# EAGLE board oa_sevenfortyfun_panel (EAGLE 6.5.0)
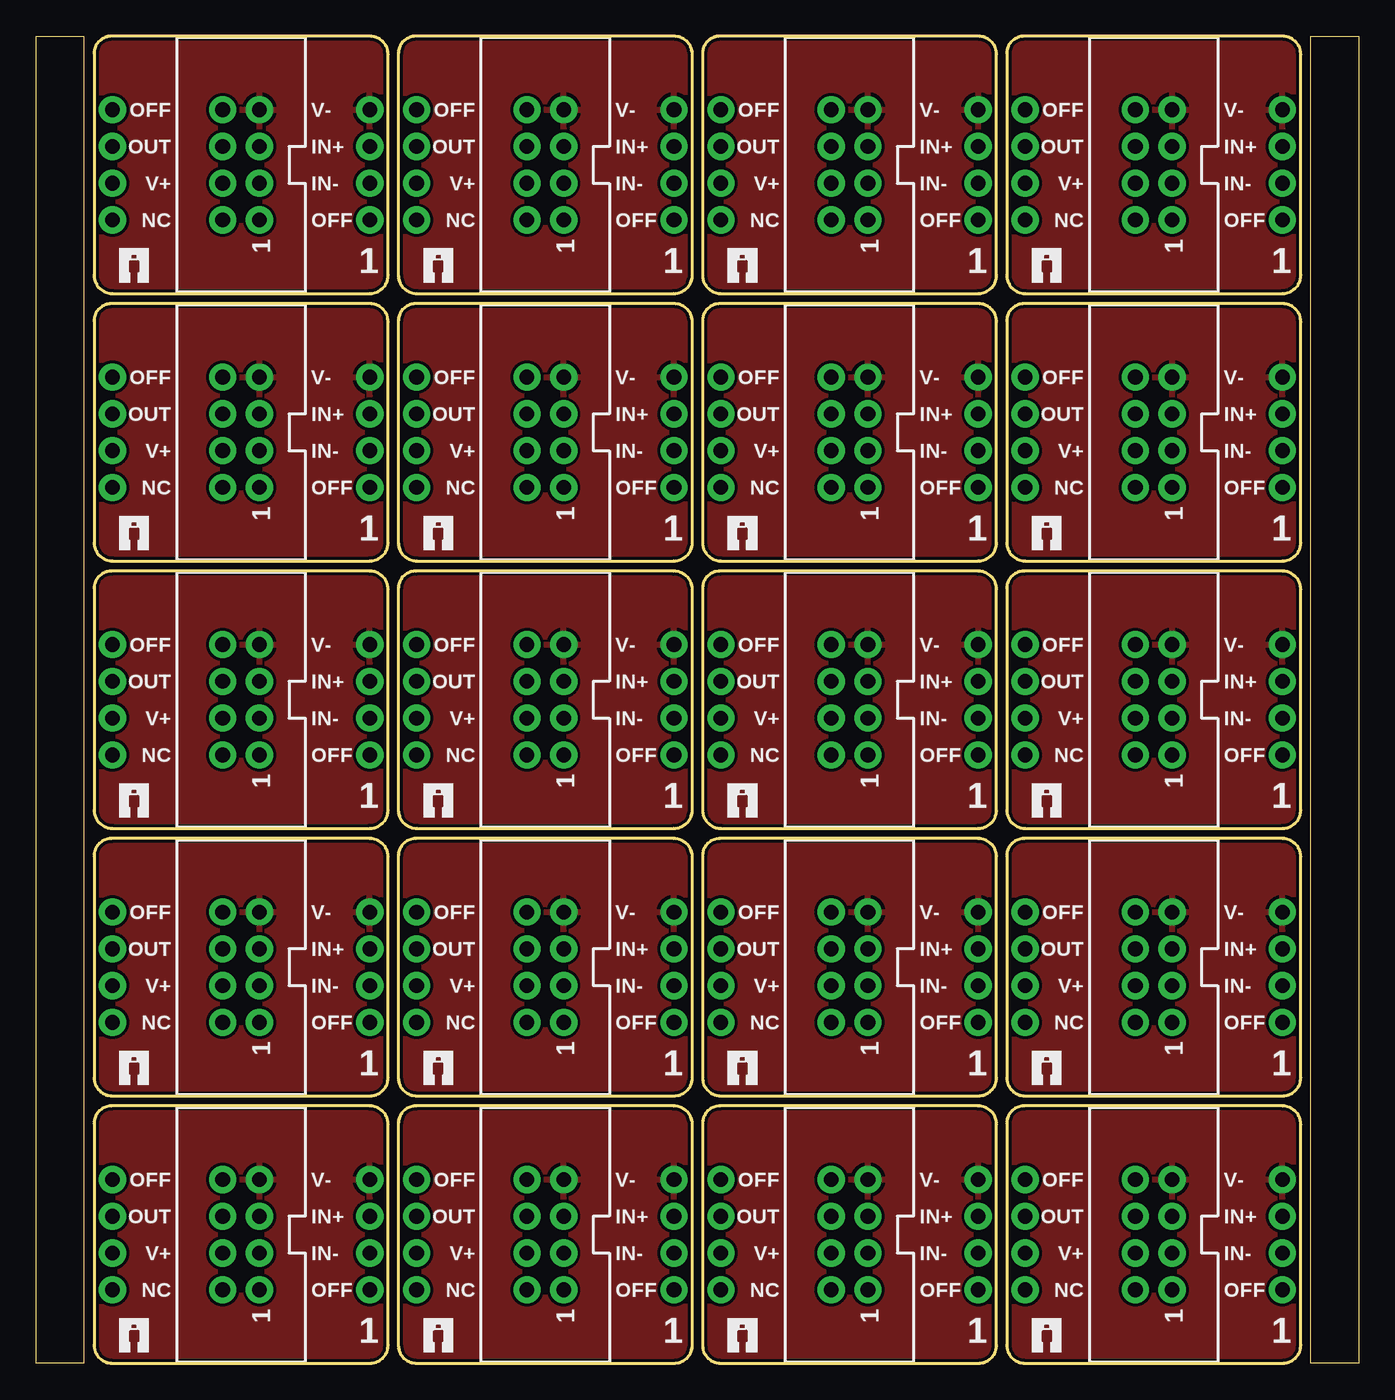
[diagram p0: board, top side]
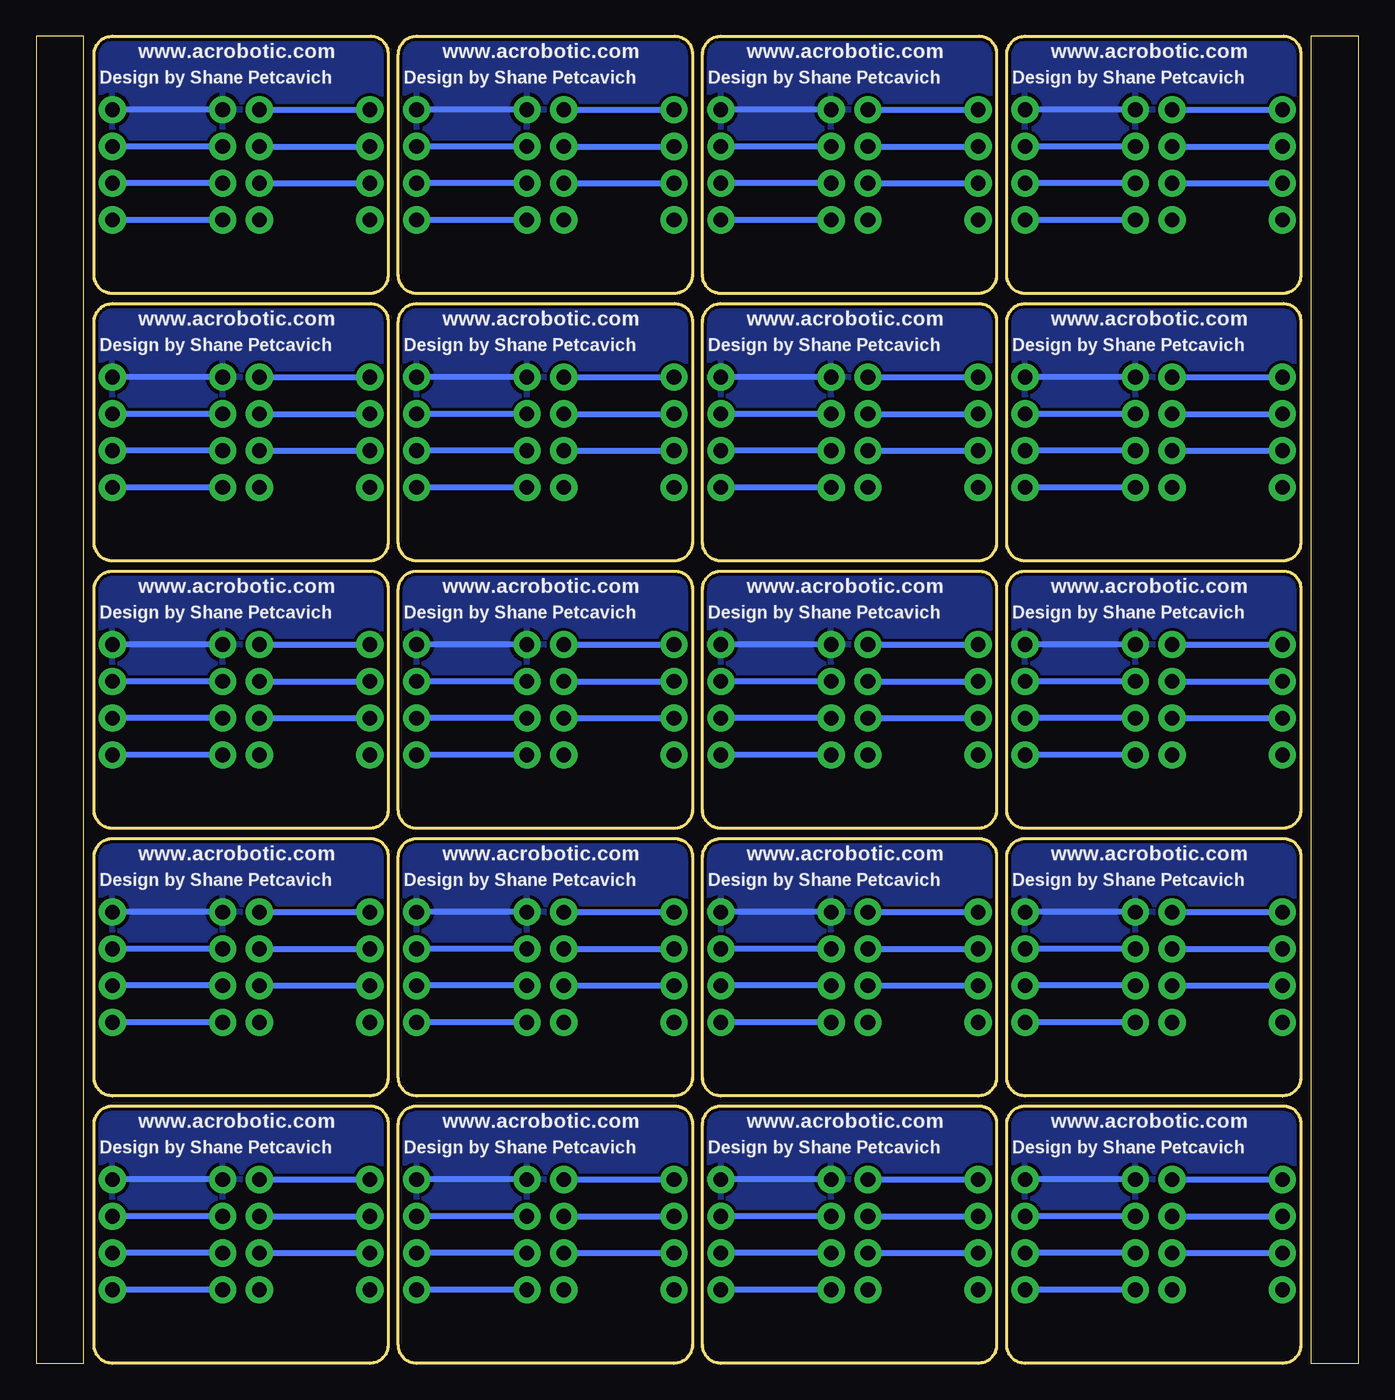
[diagram p1: board, bottom side, seen from below]

Size 91.38 x 91.7 mm. Coordinates in mm from the lower left corner, seen from the top.
Outline: 23.05,17.78 5.2,17.78 arc90 4,16.58 4,1.27 arc90 5.27,0 23.05,0 arc90 24.32,1.27 24.32,16.51 arc90 23.05,17.78
Outline: 0,0 0,91.7 3.3,91.7 3.3,0 0,0
Outline: 23.05,36.26 5.2,36.26 arc90 4,35.06 4,19.75 arc90 5.27,18.48 23.05,18.48 arc90 24.32,19.75 24.32,34.99 arc90 23.05,36.26
Outline: 23.05,54.74 5.2,54.74 arc90 4,53.54 4,38.23 arc90 5.27,36.96 23.05,36.96 arc90 24.32,38.23 24.32,53.47 arc90 23.05,54.74
Outline: 23.05,73.22 5.2,73.22 arc90 4,72.02 4,56.71 arc90 5.27,55.44 23.05,55.44 arc90 24.32,56.71 24.32,71.95 arc90 23.05,73.22
Outline: 23.05,91.7 5.2,91.7 arc90 4,90.5 4,75.19 arc90 5.27,73.92 23.05,73.92 arc90 24.32,75.19 24.32,90.43 arc90 23.05,91.7
Outline: 44.07,17.78 26.22,17.78 arc90 25.02,16.58 25.02,1.27 arc90 26.29,0 44.07,0 arc90 45.34,1.27 45.34,16.51 arc90 44.07,17.78
Outline: 44.07,36.26 26.22,36.26 arc90 25.02,35.06 25.02,19.75 arc90 26.29,18.48 44.07,18.48 arc90 45.34,19.75 45.34,34.99 arc90 44.07,36.26
Outline: 44.07,54.74 26.22,54.74 arc90 25.02,53.54 25.02,38.23 arc90 26.29,36.96 44.07,36.96 arc90 45.34,38.23 45.34,53.47 arc90 44.07,54.74
Outline: 44.07,73.22 26.22,73.22 arc90 25.02,72.02 25.02,56.71 arc90 26.29,55.44 44.07,55.44 arc90 45.34,56.71 45.34,71.95 arc90 44.07,73.22
Outline: 44.07,91.7 26.22,91.7 arc90 25.02,90.5 25.02,75.19 arc90 26.29,73.92 44.07,73.92 arc90 45.34,75.19 45.34,90.43 arc90 44.07,91.7
Outline: 65.09,17.78 47.24,17.78 arc90 46.04,16.58 46.04,1.27 arc90 47.31,0 65.09,0 arc90 66.36,1.27 66.36,16.51 arc90 65.09,17.78
Outline: 65.09,36.26 47.24,36.26 arc90 46.04,35.06 46.04,19.75 arc90 47.31,18.48 65.09,18.48 arc90 66.36,19.75 66.36,34.99 arc90 65.09,36.26
Outline: 65.09,54.74 47.24,54.74 arc90 46.04,53.54 46.04,38.23 arc90 47.31,36.96 65.09,36.96 arc90 66.36,38.23 66.36,53.47 arc90 65.09,54.74
Outline: 65.09,73.22 47.24,73.22 arc90 46.04,72.02 46.04,56.71 arc90 47.31,55.44 65.09,55.44 arc90 66.36,56.71 66.36,71.95 arc90 65.09,73.22
Outline: 65.09,91.7 47.24,91.7 arc90 46.04,90.5 46.04,75.19 arc90 47.31,73.92 65.09,73.92 arc90 66.36,75.19 66.36,90.43 arc90 65.09,91.7
Outline: 86.11,17.78 68.26,17.78 arc90 67.06,16.58 67.06,1.27 arc90 68.33,0 86.11,0 arc90 87.38,1.27 87.38,16.51 arc90 86.11,17.78
Outline: 86.11,36.26 68.26,36.26 arc90 67.06,35.06 67.06,19.75 arc90 68.33,18.48 86.11,18.48 arc90 87.38,19.75 87.38,34.99 arc90 86.11,36.26
Outline: 86.11,54.74 68.26,54.74 arc90 67.06,53.54 67.06,38.23 arc90 68.33,36.96 86.11,36.96 arc90 87.38,38.23 87.38,53.47 arc90 86.11,54.74
Outline: 86.11,73.22 68.26,73.22 arc90 67.06,72.02 67.06,56.71 arc90 68.33,55.44 86.11,55.44 arc90 87.38,56.71 87.38,71.95 arc90 86.11,73.22
Outline: 86.11,91.7 68.26,91.7 arc90 67.06,90.5 67.06,75.19 arc90 68.33,73.92 86.11,73.92 arc90 87.38,75.19 87.38,90.43 arc90 86.11,91.7
Outline: 88.08,0 88.08,91.7 91.38,91.7 91.38,0 88.08,0
Copper layers (1*16): Top 0.035mm / dielectric 1.5mm / Bottom 0.035mm
Design rules "ai_2layer": minimum track width 7mil, minimum drill 15mil, track to track 8mil, track to pad 8mil, pad to pad 8mil, via to via 8mil, smd to smd 8mil, copper to edge 8mil, drill to drill 8mil, minimum pad ring 12mil, minimum via ring 10mil, stop-mask expansion 4mil, vias tented up to drill 20mil, thermal gap 10mil
Net classes: 0 signal: width 0.254 mm; 1 power: width 0.305 mm

## Footprints (pad centres in the part's own frame; a part is rotated, then mirrored left to right if it is on the bottom)
1X04-NOSILK = drill 1.016 pad 1.88: 1 -3.81,0; 2 -1.27,0; 3 1.27,0; 4 3.81,0
1X04-NOFIRST = drill 1.016 pad 1.88: 1 -3.81,0; 2 -1.27,0; 3 1.27,0; 4 3.81,0
2X04-SHR = drill 1.016 pad 1.88: 1 -3.81,-1.27; 2 -3.81,1.27; 3 -1.27,-1.27; 4 -1.27,1.27; 5 1.27,-1.27; 6 1.27,1.27; 7 3.81,-1.27; 8 3.81,1.27

## Placement (x,y rotation side)
J1  1X04NOSILK  [1X04-NOSILK]  23.05,8.89 90 top
J2  1X04NOFIRST  [1X04-NOFIRST]  5.27,8.89 90 top
J3  2X04SHR  [2X04-SHR]  14.16,27.37 90 top
J4  1X04NOSILK  [1X04-NOSILK]  23.05,27.37 90 top
J5  1X04NOFIRST  [1X04-NOFIRST]  5.27,27.37 90 top
J6  2X04SHR  [2X04-SHR]  14.16,45.85 90 top
J7  1X04NOSILK  [1X04-NOSILK]  23.05,45.85 90 top
J8  1X04NOFIRST  [1X04-NOFIRST]  5.27,45.85 90 top
J9  2X04SHR  [2X04-SHR]  14.16,8.89 90 top
J10  2X04SHR  [2X04-SHR]  14.16,64.33 90 top
J11  1X04NOSILK  [1X04-NOSILK]  23.05,64.33 90 top
J12  1X04NOFIRST  [1X04-NOFIRST]  5.27,64.33 90 top
J13  2X04SHR  [2X04-SHR]  14.16,82.81 90 top
J14  1X04NOSILK  [1X04-NOSILK]  23.05,82.81 90 top
J15  1X04NOFIRST  [1X04-NOFIRST]  5.27,82.81 90 top
J16  2X04SHR  [2X04-SHR]  35.18,8.89 90 top
J17  1X04NOSILK  [1X04-NOSILK]  44.07,8.89 90 top
J18  1X04NOFIRST  [1X04-NOFIRST]  26.29,8.89 90 top
J19  2X04SHR  [2X04-SHR]  35.18,27.37 90 top
J20  1X04NOSILK  [1X04-NOSILK]  44.07,27.37 90 top
J21  1X04NOFIRST  [1X04-NOFIRST]  26.29,27.37 90 top
J22  2X04SHR  [2X04-SHR]  35.18,45.85 90 top
J23  1X04NOSILK  [1X04-NOSILK]  44.07,45.85 90 top
J24  1X04NOFIRST  [1X04-NOFIRST]  26.29,45.85 90 top
J25  2X04SHR  [2X04-SHR]  35.18,64.33 90 top
J26  1X04NOSILK  [1X04-NOSILK]  44.07,64.33 90 top
J27  1X04NOFIRST  [1X04-NOFIRST]  26.29,64.33 90 top
J28  2X04SHR  [2X04-SHR]  35.18,82.81 90 top
J29  1X04NOSILK  [1X04-NOSILK]  44.07,82.81 90 top
J30  1X04NOFIRST  [1X04-NOFIRST]  26.29,82.81 90 top
J31  2X04SHR  [2X04-SHR]  56.2,8.89 90 top
J32  1X04NOSILK  [1X04-NOSILK]  65.09,8.89 90 top
J33  1X04NOFIRST  [1X04-NOFIRST]  47.31,8.89 90 top
J34  2X04SHR  [2X04-SHR]  56.2,27.37 90 top
J35  1X04NOSILK  [1X04-NOSILK]  65.09,27.37 90 top
J36  1X04NOFIRST  [1X04-NOFIRST]  47.31,27.37 90 top
J37  2X04SHR  [2X04-SHR]  56.2,45.85 90 top
J38  1X04NOSILK  [1X04-NOSILK]  65.09,45.85 90 top
J39  1X04NOFIRST  [1X04-NOFIRST]  47.31,45.85 90 top
J40  2X04SHR  [2X04-SHR]  56.2,64.33 90 top
J41  1X04NOSILK  [1X04-NOSILK]  65.09,64.33 90 top
J42  1X04NOFIRST  [1X04-NOFIRST]  47.31,64.33 90 top
J43  2X04SHR  [2X04-SHR]  56.2,82.81 90 top
J44  1X04NOSILK  [1X04-NOSILK]  65.09,82.81 90 top
J45  1X04NOFIRST  [1X04-NOFIRST]  47.31,82.81 90 top
J46  2X04SHR  [2X04-SHR]  77.22,8.89 90 top
J47  1X04NOSILK  [1X04-NOSILK]  86.11,8.89 90 top
J48  1X04NOFIRST  [1X04-NOFIRST]  68.33,8.89 90 top
J49  2X04SHR  [2X04-SHR]  77.22,27.37 90 top
J50  1X04NOSILK  [1X04-NOSILK]  86.11,27.37 90 top
J51  1X04NOFIRST  [1X04-NOFIRST]  68.33,27.37 90 top
J52  2X04SHR  [2X04-SHR]  77.22,45.85 90 top
J53  1X04NOSILK  [1X04-NOSILK]  86.11,45.85 90 top
J54  1X04NOFIRST  [1X04-NOFIRST]  68.33,45.85 90 top
J55  2X04SHR  [2X04-SHR]  77.22,64.33 90 top
J56  1X04NOSILK  [1X04-NOSILK]  86.11,64.33 90 top
J57  1X04NOFIRST  [1X04-NOFIRST]  68.33,64.33 90 top
J58  2X04SHR  [2X04-SHR]  77.22,82.81 90 top
J59  1X04NOSILK  [1X04-NOSILK]  86.11,82.81 90 top
J60  1X04NOFIRST  [1X04-NOFIRST]  68.33,82.81 90 top
U$1  AI-LOGOXS  [AI-LOGO-XS]  5.78,19.24 0 top
U$2  AI-LOGOXS  [AI-LOGO-XS]  5.78,37.72 0 top
U$3  AI-LOGOXS  [AI-LOGO-XS]  5.78,0.76 0 top
U$4  AI-LOGOXS  [AI-LOGO-XS]  5.78,56.2 0 top
U$5  AI-LOGOXS  [AI-LOGO-XS]  5.78,74.68 0 top
U$6  AI-LOGOXS  [AI-LOGO-XS]  26.8,0.76 0 top
U$7  AI-LOGOXS  [AI-LOGO-XS]  26.8,19.24 0 top
U$8  AI-LOGOXS  [AI-LOGO-XS]  26.8,37.72 0 top
U$9  AI-LOGOXS  [AI-LOGO-XS]  26.8,56.2 0 top
U$10  AI-LOGOXS  [AI-LOGO-XS]  26.8,74.68 0 top
U$11  AI-LOGOXS  [AI-LOGO-XS]  47.82,0.76 0 top
U$12  AI-LOGOXS  [AI-LOGO-XS]  47.82,19.24 0 top
U$13  AI-LOGOXS  [AI-LOGO-XS]  47.82,37.72 0 top
U$14  AI-LOGOXS  [AI-LOGO-XS]  47.82,56.2 0 top
U$15  AI-LOGOXS  [AI-LOGO-XS]  47.82,74.68 0 top
U$16  AI-LOGOXS  [AI-LOGO-XS]  68.84,0.76 0 top
U$17  AI-LOGOXS  [AI-LOGO-XS]  68.84,19.24 0 top
U$18  AI-LOGOXS  [AI-LOGO-XS]  68.84,37.72 0 top
U$19  AI-LOGOXS  [AI-LOGO-XS]  68.84,56.2 0 top
U$20  AI-LOGOXS  [AI-LOGO-XS]  68.84,74.68 0 top

## Library data of the parts
J1-J60 = Ai_Connectors
U$1-U$20 = Ai_Miscellany

## Nets
INVERTING(-): J1.2 J9.3
INVERTING(-)1: J3.3 J4.2
INVERTING(-)2: J6.3 J7.2
INVERTING(-)3: J10.3 J11.2
INVERTING(-)4: J13.3 J14.2
INVERTING(-)5: J16.3 J17.2
INVERTING(-)6: J19.3 J20.2
INVERTING(-)7: J22.3 J23.2
INVERTING(-)8: J25.3 J26.2
INVERTING(-)9: J28.3 J29.2
INVERTING(-)10: J31.3 J32.2
INVERTING(-)11: J34.3 J35.2
INVERTING(-)12: J37.3 J38.2
INVERTING(-)13: J40.3 J41.2
INVERTING(-)14: J43.3 J44.2
INVERTING(-)15: J46.3 J47.2
INVERTING(-)16: J49.3 J50.2
INVERTING(-)17: J52.3 J53.2
INVERTING(-)18: J55.3 J56.2
INVERTING(-)19: J58.3 J59.2
NON-INVERTING(+): J1.3 J9.5
NON-INVERTING(+)1: J3.5 J4.3
NON-INVERTING(+)2: J6.5 J7.3
NON-INVERTING(+)3: J10.5 J11.3
NON-INVERTING(+)4: J13.5 J14.3
NON-INVERTING(+)5: J16.5 J17.3
NON-INVERTING(+)6: J19.5 J20.3
NON-INVERTING(+)7: J22.5 J23.3
NON-INVERTING(+)8: J25.5 J26.3
NON-INVERTING(+)9: J28.5 J29.3
NON-INVERTING(+)10: J31.5 J32.3
NON-INVERTING(+)11: J34.5 J35.3
NON-INVERTING(+)12: J37.5 J38.3
NON-INVERTING(+)13: J40.5 J41.3
NON-INVERTING(+)14: J43.5 J44.3
NON-INVERTING(+)15: J46.5 J47.3
NON-INVERTING(+)16: J49.5 J50.3
NON-INVERTING(+)17: J52.5 J53.3
NON-INVERTING(+)18: J55.5 J56.3
NON-INVERTING(+)19: J58.5 J59.3
OFFSET_NULL1: J1.1 J9.1
OFFSET_NULL2: J2.4 J9.8
OFFSET_NULL3: J3.8 J5.4
OFFSET_NULL4: J3.1 J4.1
OFFSET_NULL5: J6.8 J8.4
OFFSET_NULL6: J6.1 J7.1
OFFSET_NULL7: J10.8 J12.4
OFFSET_NULL8: J10.1 J11.1
OFFSET_NULL9: J13.8 J15.4
OFFSET_NULL10: J13.1 J14.1
OFFSET_NULL11: J16.8 J18.4
OFFSET_NULL12: J16.1 J17.1
OFFSET_NULL13: J19.8 J21.4
OFFSET_NULL14: J19.1 J20.1
OFFSET_NULL15: J22.8 J24.4
OFFSET_NULL16: J22.1 J23.1
OFFSET_NULL17: J25.8 J27.4
OFFSET_NULL18: J25.1 J26.1
OFFSET_NULL19: J28.8 J30.4
OFFSET_NULL20: J28.1 J29.1
OFFSET_NULL21: J31.8 J33.4
OFFSET_NULL22: J31.1 J32.1
OFFSET_NULL23: J34.8 J36.4
OFFSET_NULL24: J34.1 J35.1
OFFSET_NULL25: J37.8 J39.4
OFFSET_NULL26: J37.1 J38.1
OFFSET_NULL27: J40.8 J42.4
OFFSET_NULL28: J40.1 J41.1
OFFSET_NULL29: J43.8 J45.4
OFFSET_NULL30: J43.1 J44.1
OFFSET_NULL31: J46.8 J48.4
OFFSET_NULL32: J46.1 J47.1
OFFSET_NULL33: J49.8 J51.4
OFFSET_NULL34: J49.1 J50.1
OFFSET_NULL35: J52.8 J54.4
OFFSET_NULL36: J52.1 J53.1
OFFSET_NULL37: J55.8 J57.4
OFFSET_NULL38: J55.1 J56.1
OFFSET_NULL39: J58.8 J60.4
OFFSET_NULL40: J58.1 J59.1
OUTPUT: J2.3 J9.6
OUTPUT1: J3.6 J5.3
OUTPUT2: J6.6 J8.3
OUTPUT3: J10.6 J12.3
OUTPUT4: J13.6 J15.3
OUTPUT5: J16.6 J18.3
OUTPUT6: J19.6 J21.3
OUTPUT7: J22.6 J24.3
OUTPUT8: J25.6 J27.3
OUTPUT9: J28.6 J30.3
OUTPUT10: J31.6 J33.3
OUTPUT11: J34.6 J36.3
OUTPUT12: J37.6 J39.3
OUTPUT13: J40.6 J42.3
OUTPUT14: J43.6 J45.3
OUTPUT15: J46.6 J48.3
OUTPUT16: J49.6 J51.3
OUTPUT17: J52.6 J54.3
OUTPUT18: J55.6 J57.3
OUTPUT19: J58.6 J60.3
VCC+: J2.2 J9.4
VCC+1: J3.4 J5.2
VCC+2: J6.4 J8.2
VCC+3: J10.4 J12.2
VCC+4: J13.4 J15.2
VCC+5: J16.4 J18.2
VCC+6: J19.4 J21.2
VCC+7: J22.4 J24.2
VCC+8: J25.4 J27.2
VCC+9: J28.4 J30.2
VCC+10: J31.4 J33.2
VCC+11: J34.4 J36.2
VCC+12: J37.4 J39.2
VCC+13: J40.4 J42.2
VCC+14: J43.4 J45.2
VCC+15: J46.4 J48.2
VCC+16: J49.4 J51.2
VCC+17: J52.4 J54.2
VCC+18: J55.4 J57.2
VCC+19: J58.4 J60.2
VCC-: J1.4 J9.7
VCC-1: J3.7 J4.4
VCC-2: J6.7 J7.4
VCC-3: J10.7 J11.4
VCC-4: J13.7 J14.4
VCC-5: J16.7 J17.4
VCC-6: J19.7 J20.4
VCC-7: J22.7 J23.4
VCC-8: J25.7 J26.4
VCC-9: J28.7 J29.4
VCC-10: J31.7 J32.4
VCC-11: J34.7 J35.4
VCC-12: J37.7 J38.4
VCC-13: J40.7 J41.4
VCC-14: J43.7 J44.4
VCC-15: J46.7 J47.4
VCC-16: J49.7 J50.4
VCC-17: J52.7 J53.4
VCC-18: J55.7 J56.4
VCC-19: J58.7 J59.4

## Tracks (layer width: path | path; a pad name or v marks a point on that pad's centre or on a via)
INVERTING(-)
  Bottom 0.406: J9.3 J1.2
INVERTING(-)1
  Bottom 0.406: J3.3 J4.2
INVERTING(-)2
  Bottom 0.406: J6.3 J7.2
INVERTING(-)3
  Bottom 0.406: J10.3 J11.2
INVERTING(-)4
  Bottom 0.406: J13.3 J14.2
INVERTING(-)5
  Bottom 0.406: J16.3 J17.2
INVERTING(-)6
  Bottom 0.406: J19.3 J20.2
INVERTING(-)7
  Bottom 0.406: J22.3 J23.2
INVERTING(-)8
  Bottom 0.406: J25.3 J26.2
INVERTING(-)9
  Bottom 0.406: J28.3 J29.2
INVERTING(-)10
  Bottom 0.406: J31.3 J32.2
INVERTING(-)11
  Bottom 0.406: J34.3 J35.2
INVERTING(-)12
  Bottom 0.406: J37.3 J38.2
INVERTING(-)13
  Bottom 0.406: J40.3 J41.2
INVERTING(-)14
  Bottom 0.406: J43.3 J44.2
INVERTING(-)15
  Bottom 0.406: J46.3 J47.2
INVERTING(-)16
  Bottom 0.406: J49.3 J50.2
INVERTING(-)17
  Bottom 0.406: J52.3 J53.2
INVERTING(-)18
  Bottom 0.406: J55.3 J56.2
INVERTING(-)19
  Bottom 0.406: J58.3 J59.2
NON-INVERTING(+)
  Bottom 0.406: J9.5 J1.3
NON-INVERTING(+)1
  Bottom 0.406: J3.5 J4.3
NON-INVERTING(+)2
  Bottom 0.406: J6.5 J7.3
NON-INVERTING(+)3
  Bottom 0.406: J10.5 J11.3
NON-INVERTING(+)4
  Bottom 0.406: J13.5 J14.3
NON-INVERTING(+)5
  Bottom 0.406: J16.5 J17.3
NON-INVERTING(+)6
  Bottom 0.406: J19.5 J20.3
NON-INVERTING(+)7
  Bottom 0.406: J22.5 J23.3
NON-INVERTING(+)8
  Bottom 0.406: J25.5 J26.3
NON-INVERTING(+)9
  Bottom 0.406: J28.5 J29.3
NON-INVERTING(+)10
  Bottom 0.406: J31.5 J32.3
NON-INVERTING(+)11
  Bottom 0.406: J34.5 J35.3
NON-INVERTING(+)12
  Bottom 0.406: J37.5 J38.3
NON-INVERTING(+)13
  Bottom 0.406: J40.5 J41.3
NON-INVERTING(+)14
  Bottom 0.406: J43.5 J44.3
NON-INVERTING(+)15
  Bottom 0.406: J46.5 J47.3
NON-INVERTING(+)16
  Bottom 0.406: J49.5 J50.3
NON-INVERTING(+)17
  Bottom 0.406: J52.5 J53.3
NON-INVERTING(+)18
  Bottom 0.406: J55.5 J56.3
NON-INVERTING(+)19
  Bottom 0.406: J58.5 J59.3
OFFSET_NULL1
  Bottom 0.406: J9.1 J1.1
OFFSET_NULL2
  Bottom 0.406: J9.8 J2.4
OFFSET_NULL3
  Bottom 0.406: J3.8 J5.4
OFFSET_NULL4
  Bottom 0.406: J3.1 J4.1
OFFSET_NULL5
  Bottom 0.406: J6.8 J8.4
OFFSET_NULL6
  Bottom 0.406: J6.1 J7.1
OFFSET_NULL7
  Bottom 0.406: J10.8 J12.4
OFFSET_NULL8
  Bottom 0.406: J10.1 J11.1
OFFSET_NULL9
  Bottom 0.406: J13.8 J15.4
OFFSET_NULL10
  Bottom 0.406: J13.1 J14.1
OFFSET_NULL11
  Bottom 0.406: J16.8 J18.4
OFFSET_NULL12
  Bottom 0.406: J16.1 J17.1
OFFSET_NULL13
  Bottom 0.406: J19.8 J21.4
OFFSET_NULL14
  Bottom 0.406: J19.1 J20.1
OFFSET_NULL15
  Bottom 0.406: J22.8 J24.4
OFFSET_NULL16
  Bottom 0.406: J22.1 J23.1
OFFSET_NULL17
  Bottom 0.406: J25.8 J27.4
OFFSET_NULL18
  Bottom 0.406: J25.1 J26.1
OFFSET_NULL19
  Bottom 0.406: J28.8 J30.4
OFFSET_NULL20
  Bottom 0.406: J28.1 J29.1
OFFSET_NULL21
  Bottom 0.406: J31.8 J33.4
OFFSET_NULL22
  Bottom 0.406: J31.1 J32.1
OFFSET_NULL23
  Bottom 0.406: J34.8 J36.4
OFFSET_NULL24
  Bottom 0.406: J34.1 J35.1
OFFSET_NULL25
  Bottom 0.406: J37.8 J39.4
OFFSET_NULL26
  Bottom 0.406: J37.1 J38.1
OFFSET_NULL27
  Bottom 0.406: J40.8 J42.4
OFFSET_NULL28
  Bottom 0.406: J40.1 J41.1
OFFSET_NULL29
  Bottom 0.406: J43.8 J45.4
OFFSET_NULL30
  Bottom 0.406: J43.1 J44.1
OFFSET_NULL31
  Bottom 0.406: J46.8 J48.4
OFFSET_NULL32
  Bottom 0.406: J46.1 J47.1
OFFSET_NULL33
  Bottom 0.406: J49.8 J51.4
OFFSET_NULL34
  Bottom 0.406: J49.1 J50.1
OFFSET_NULL35
  Bottom 0.406: J52.8 J54.4
OFFSET_NULL36
  Bottom 0.406: J52.1 J53.1
OFFSET_NULL37
  Bottom 0.406: J55.8 J57.4
OFFSET_NULL38
  Bottom 0.406: J55.1 J56.1
OFFSET_NULL39
  Bottom 0.406: J58.8 J60.4
OFFSET_NULL40
  Bottom 0.406: J58.1 J59.1
OUTPUT
  Bottom 0.406: J9.6 J2.3
OUTPUT1
  Bottom 0.406: J3.6 J5.3
OUTPUT2
  Bottom 0.406: J6.6 J8.3
OUTPUT3
  Bottom 0.406: J10.6 J12.3
OUTPUT4
  Bottom 0.406: J13.6 J15.3
OUTPUT5
  Bottom 0.406: J16.6 J18.3
OUTPUT6
  Bottom 0.406: J19.6 J21.3
OUTPUT7
  Bottom 0.406: J22.6 J24.3
OUTPUT8
  Bottom 0.406: J25.6 J27.3
OUTPUT9
  Bottom 0.406: J28.6 J30.3
OUTPUT10
  Bottom 0.406: J31.6 J33.3
OUTPUT11
  Bottom 0.406: J34.6 J36.3
OUTPUT12
  Bottom 0.406: J37.6 J39.3
OUTPUT13
  Bottom 0.406: J40.6 J42.3
OUTPUT14
  Bottom 0.406: J43.6 J45.3
OUTPUT15
  Bottom 0.406: J46.6 J48.3
OUTPUT16
  Bottom 0.406: J49.6 J51.3
OUTPUT17
  Bottom 0.406: J52.6 J54.3
OUTPUT18
  Bottom 0.406: J55.6 J57.3
OUTPUT19
  Bottom 0.406: J58.6 J60.3
VCC+
  Bottom 0.406: J9.4 J2.2
VCC+1
  Bottom 0.406: J3.4 J5.2
VCC+2
  Bottom 0.406: J6.4 J8.2
VCC+3
  Bottom 0.406: J10.4 J12.2
VCC+4
  Bottom 0.406: J13.4 J15.2
VCC+5
  Bottom 0.406: J16.4 J18.2
VCC+6
  Bottom 0.406: J19.4 J21.2
VCC+7
  Bottom 0.406: J22.4 J24.2
VCC+8
  Bottom 0.406: J25.4 J27.2
VCC+9
  Bottom 0.406: J28.4 J30.2
VCC+10
  Bottom 0.406: J31.4 J33.2
VCC+11
  Bottom 0.406: J34.4 J36.2
VCC+12
  Bottom 0.406: J37.4 J39.2
VCC+13
  Bottom 0.406: J40.4 J42.2
VCC+14
  Bottom 0.406: J43.4 J45.2
VCC+15
  Bottom 0.406: J46.4 J48.2
VCC+16
  Bottom 0.406: J49.4 J51.2
VCC+17
  Bottom 0.406: J52.4 J54.2
VCC+18
  Bottom 0.406: J55.4 J57.2
VCC+19
  Bottom 0.406: J58.4 J60.2
VCC-
  Bottom 0.406: J9.7 J1.4
  pour Bottom: 4,17.78 24.32,17.78 24.32,0 4,0
  pour Top: 4,0 4,17.78 24.32,17.78 24.32,0
VCC-1
  Bottom 0.406: J3.7 J4.4
  pour Bottom: 4,36.26 24.32,36.26 24.32,18.48 4,18.48
  pour Top: 4,18.48 4,36.26 24.32,36.26 24.32,18.48
VCC-2
  Bottom 0.406: J6.7 J7.4
  pour Bottom: 4,54.74 24.32,54.74 24.32,36.96 4,36.96
  pour Top: 4,36.96 4,54.74 24.32,54.74 24.32,36.96
VCC-3
  Bottom 0.406: J10.7 J11.4
  pour Bottom: 4,73.22 24.32,73.22 24.32,55.44 4,55.44
  pour Top: 4,55.44 4,73.22 24.32,73.22 24.32,55.44
VCC-4
  Bottom 0.406: J13.7 J14.4
  pour Bottom: 4,91.7 24.32,91.7 24.32,73.92 4,73.92
  pour Top: 4,73.92 4,91.7 24.32,91.7 24.32,73.92
VCC-5
  Bottom 0.406: J16.7 J17.4
  pour Bottom: 25.02,17.78 45.34,17.78 45.34,0 25.02,0
  pour Top: 25.02,0 25.02,17.78 45.34,17.78 45.34,0
VCC-6
  Bottom 0.406: J19.7 J20.4
  pour Bottom: 25.02,36.26 45.34,36.26 45.34,18.48 25.02,18.48
  pour Top: 25.02,18.48 25.02,36.26 45.34,36.26 45.34,18.48
VCC-7
  Bottom 0.406: J22.7 J23.4
  pour Bottom: 25.02,54.74 45.34,54.74 45.34,36.96 25.02,36.96
  pour Top: 25.02,36.96 25.02,54.74 45.34,54.74 45.34,36.96
VCC-8
  Bottom 0.406: J25.7 J26.4
  pour Bottom: 25.02,73.22 45.34,73.22 45.34,55.44 25.02,55.44
  pour Top: 25.02,55.44 25.02,73.22 45.34,73.22 45.34,55.44
VCC-9
  Bottom 0.406: J28.7 J29.4
  pour Bottom: 25.02,91.7 45.34,91.7 45.34,73.92 25.02,73.92
  pour Top: 25.02,73.92 25.02,91.7 45.34,91.7 45.34,73.92
VCC-10
  Bottom 0.406: J31.7 J32.4
  pour Bottom: 46.04,17.78 66.36,17.78 66.36,0 46.04,0
  pour Top: 46.04,0 46.04,17.78 66.36,17.78 66.36,0
VCC-11
  Bottom 0.406: J34.7 J35.4
  pour Bottom: 46.04,36.26 66.36,36.26 66.36,18.48 46.04,18.48
  pour Top: 46.04,18.48 46.04,36.26 66.36,36.26 66.36,18.48
VCC-12
  Bottom 0.406: J37.7 J38.4
  pour Bottom: 46.04,54.74 66.36,54.74 66.36,36.96 46.04,36.96
  pour Top: 46.04,36.96 46.04,54.74 66.36,54.74 66.36,36.96
VCC-13
  Bottom 0.406: J40.7 J41.4
  pour Bottom: 46.04,73.22 66.36,73.22 66.36,55.44 46.04,55.44
  pour Top: 46.04,55.44 46.04,73.22 66.36,73.22 66.36,55.44
VCC-14
  Bottom 0.406: J43.7 J44.4
  pour Bottom: 46.04,91.7 66.36,91.7 66.36,73.92 46.04,73.92
  pour Top: 46.04,73.92 46.04,91.7 66.36,91.7 66.36,73.92
VCC-15
  Bottom 0.406: J46.7 J47.4
  pour Bottom: 67.06,17.78 87.38,17.78 87.38,0 67.06,0
  pour Top: 67.06,0 67.06,17.78 87.38,17.78 87.38,0
VCC-16
  Bottom 0.406: J49.7 J50.4
  pour Bottom: 67.06,36.26 87.38,36.26 87.38,18.48 67.06,18.48
  pour Top: 67.06,18.48 67.06,36.26 87.38,36.26 87.38,18.48
VCC-17
  Bottom 0.406: J52.7 J53.4
  pour Bottom: 67.06,54.74 87.38,54.74 87.38,36.96 67.06,36.96
  pour Top: 67.06,36.96 67.06,54.74 87.38,54.74 87.38,36.96
VCC-18
  Bottom 0.406: J55.7 J56.4
  pour Bottom: 67.06,73.22 87.38,73.22 87.38,55.44 67.06,55.44
  pour Top: 67.06,55.44 67.06,73.22 87.38,73.22 87.38,55.44
VCC-19
  Bottom 0.406: J58.7 J59.4
  pour Bottom: 67.06,91.7 87.38,91.7 87.38,73.92 67.06,73.92
  pour Top: 67.06,73.92 67.06,91.7 87.38,91.7 87.38,73.92

## Text on the board
tPlace: OFF | OFF | OFF | OFF | V- | V- | V- | V- | OUT | OUT | OUT | OUT | IN+ | IN+ | IN+ | IN+ | V+ | V+ | V+ | V+ | IN- | IN- | IN- | IN- | NC | NC | NC | NC | OFF | OFF | OFF | OFF | 1 | 1 | 1 | 1 | OFF | OFF | OFF | OFF | V- | V- | V- | V- | OUT | OUT | OUT | OUT | IN+ | IN+ | IN+ | IN+ | V+ | V+ | V+ | V+ | IN- | IN- | IN- | IN- | NC | NC | NC | NC | OFF | OFF | OFF | OFF | 1 | 1 | 1 | 1 | OFF | OFF | OFF | OFF | V- | V- | V- | V- | OUT | OUT | OUT | OUT | IN+ | IN+ | IN+ | IN+ | V+ | V+ | V+ | V+ | IN- | IN- | IN- | IN- | NC | NC | NC | NC | OFF | OFF | OFF | OFF | 1 | 1 | 1 | 1 | OFF | OFF | OFF | OFF | V- | V- | V- | V- | OUT | OUT | OUT | OUT | IN+ | IN+ | IN+ | IN+ | V+ | V+ | V+ | V+ | IN- | IN- | IN- | IN- | NC | NC | NC | NC | OFF | OFF | OFF | OFF | 1 | 1 | 1 | 1 | OFF | OFF | OFF | OFF | V- | V- | V- | V- | OUT | OUT | OUT | OUT | IN+ | IN+ | IN+ | IN+ | V+ | V+ | V+ | V+ | IN- | IN- | IN- | IN- | NC | NC | NC | NC | OFF | OFF | OFF | OFF | 1 | 1 | 1 | 1
bPlace: www.acrobotic.com | www.acrobotic.com | www.acrobotic.com | www.acrobotic.com | Design by Shane Petcavich | Design by Shane Petcavich | Design by Shane Petcavich | Design by Shane Petcavich | www.acrobotic.com | www.acrobotic.com | www.acrobotic.com | www.acrobotic.com | Design by Shane Petcavich | Design by Shane Petcavich | Design by Shane Petcavich | Design by Shane Petcavich | www.acrobotic.com | www.acrobotic.com | www.acrobotic.com | www.acrobotic.com | Design by Shane Petcavich | Design by Shane Petcavich | Design by Shane Petcavich | Design by Shane Petcavich | www.acrobotic.com | www.acrobotic.com | www.acrobotic.com | www.acrobotic.com | Design by Shane Petcavich | Design by Shane Petcavich | Design by Shane Petcavich | Design by Shane Petcavich | www.acrobotic.com | www.acrobotic.com | www.acrobotic.com | www.acrobotic.com | Design by Shane Petcavich | Design by Shane Petcavich | Design by Shane Petcavich | Design by Shane Petcavich